# EAGLE board Warmie Helper Board V.9.5 (GND EN 3.3v) (EAGLE 6.4)
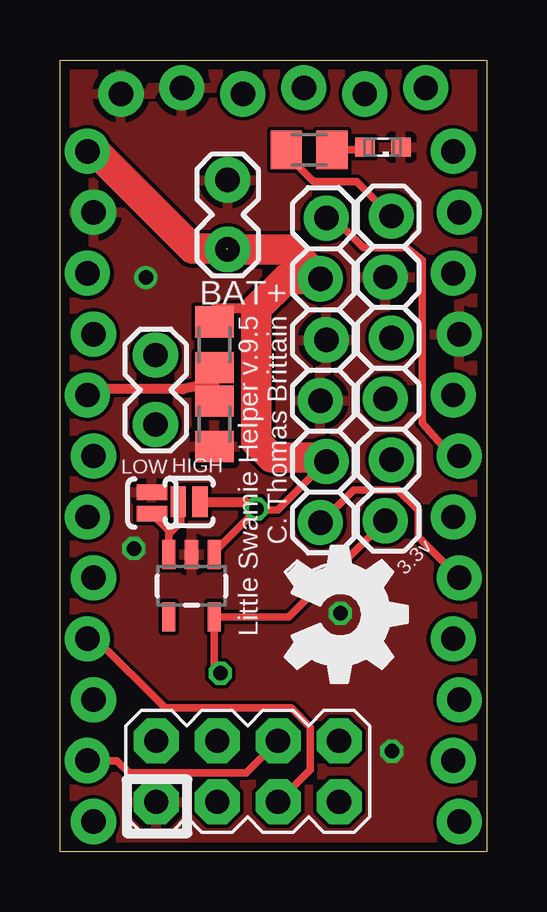
[diagram p0: board, top side]
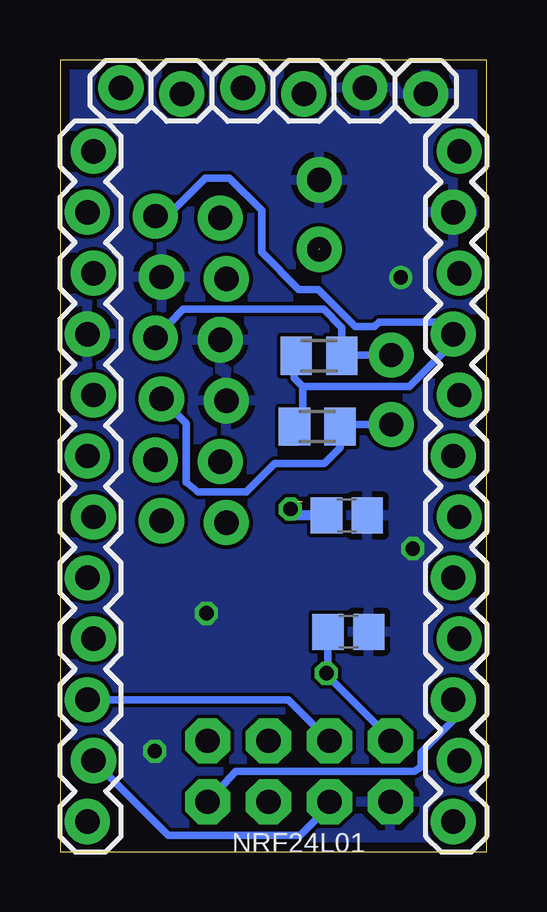
[diagram p1: board, bottom side, seen from below]

Size 17.78 x 33.02 mm. Coordinates in mm from the lower left corner, seen from the top.
Outline: 17.78,0 0,0 0,33.02 17.78,33.02 17.78,0
Copper layers (1*16): Top 0.0356mm / dielectric 1.25mm / Bottom 0.0356mm
Design rules "LaenPCBOrder *": minimum track width 6mil, minimum drill 13mil, track to track 6mil, track to pad 6mil, pad to pad 6mil, via to via 6mil, smd to smd 6mil, copper to edge 15mil, drill to drill 6mil, minimum pad ring 7mil, minimum via ring 7mil, stop-mask expansion 4mil, vias tented up to drill 6mm, thermal gap 10mil

## Footprints (pad centres in the part's own frame; a part is rotated, then mirrored left to right if it is on the bottom)
1X02_LOCK = drill 1.016 pad 1.88: 1 -0.178,0; 2 2.718,0
C0805 = smd 1.3 x 1.5: 1 -0.85,0; 2 0.85,0
1X12_LOCK = drill 1.016 pad 1.88: 1 0,0.127; 2 2.54,-0.127; 3 5.08,0.127; 4 7.62,-0.127; 5 10.16,0.127; 6 12.7,-0.127; 7 15.24,0.127; 8 17.78,-0.127; 9 20.32,0.127; 10 22.86,-0.127; 11 25.4,0.127; 12 27.94,-0.127
1X06_LOCK = drill 1.016 pad 1.88: 1 0,0; 2 2.54,-0.254; 3 5.08,0; 4 7.62,-0.254; 5 10.16,0; 6 12.7,-0.254
SML0603 = smd 0.8 x 0.8: A 0.75,0; C -0.75,0
2X4 = drill 1.016 pad 1.88 octagon: 1 -3.81,-1.27; 2 -3.81,1.27; 3 -1.27,-1.27; 4 -1.27,1.27; 5 1.27,-1.27; 6 1.27,1.27; 7 3.81,-1.27; 8 3.81,1.27
M0805 = smd 1.3 x 1.6: 1 -0.95,0; 2 0.95,0
SJ_2S-NO = smd 0.635 x 1.27: 1 -0.45,0; 2 0.45,0
SOT23-5 = smd 0.55 x 1.2: 1 -0.95,-1.3; 2 0,-1.3; 3 0.95,-1.3; 4 0.95,1.3; 5 -0.95,1.3

## Placement (x,y rotation side)
BATTERY  [1X02_LOCK]  6.98,25.3 90 top
C1  1uF  [C0805]  5.76,9.18 0 bottom
C2  1uF  [C0805]  5.83,14.03 0 bottom
JP1  M12LOCK  [1X12_LOCK]  1.27,1.27 90 bottom
JP2  M12LOCK  [1X12_LOCK]  16.51,1.27 90 bottom
JP5  [1X02_LOCK]  3.98,18 90 top
JP6  [1X06_LOCK]  2.54,31.6 180 bottom
JP8  [1X06_LOCK]  10.85,13.73 90 top
JP9  [1X06_LOCK]  13.8,26.51 270 top
LED1  [SML0603]  13.46,29.38 180 top
NRF24L01  M04X2  [2X4]  7.82,3.36 180 top
R1  4.7k  [M0805]  7.06,17.74 0 bottom
R2  4.7k  [M0805]  6.99,20.69 0 bottom
R3  330  [M0805]  10.38,29.27 180 top
R4  330  [M0805]  6.43,21.15 270 top
R5  330  [M0805]  6.43,17.85 270 top
SJ1  SOLDERJUMPERNO  [SJ_2S-NO]  5.38,14.6 0 top
SJ2  SOLDERJUMPERNO  [SJ_2S-NO]  3.83,14.55 270 top
U1  AAT3221/22  [SOT23-5]  5.48,11.1 180 top
U$2  [OSHW_FILLX200_NOTEXT]  9.39,12.74 270 top

## Library data of the parts
BATTERY JP1 JP2 JP5 JP6 JP8 JP9 NRF24L01 SJ1 SJ2 U1 = SparkFun
C1 C2 R1-R5 = resistor
LED1 = led
U$2 = ohw-logo

## Nets
5V: JP1.9 JP9.1 R1.1 R2.1 R3.2
A0: JP1.5
A1: JP1.6
A2: JP1.7
A3: JP1.8 R4.2 R5.1
A4: JP5.1 JP9.4 R1.2
A5: JP5.2 JP9.3 R2.2
CE: JP2.2 NRF24L01.6
CSN: JP2.3 NRF24L01.5
D2: JP2.8
D3: JP2.7 JP8.6
D4: JP2.6
D5: JP2.5 JP8.1
D6: JP2.4
D9: JP2.1
DTR: JP6.6
GND: BATTERY.2 C1.2 C2.2 JP1.11 JP2.9 JP6.1 JP6.2 JP8.3 JP8.4 JP9.2 LED1.C NRF24L01.8 R5.2 SJ2.1 U1.2
IRQ: NRF24L01.1
MISO: JP1.3 NRF24L01.2
MOSI: JP1.2 NRF24L01.3
N$1: SJ1.1 SJ2.2 U1.3
N$2: LED1.A R3.1
RST1: JP1.10
RST2: JP2.10
RX1: JP6.4
RX2: JP2.11
SCK: JP1.4 NRF24L01.4
TX1: JP6.5
TX2: JP2.12
V3.3: C1.1 JP9.6 NRF24L01.7 U1.5
VBUS: JP6.3
VIN: BATTERY.1 C2.1 JP1.12 JP8.2 JP8.5 R4.1 SJ1.2 U1.1

## Tracks (layer width: path | path; a pad name or v marks a point on that pad's centre or on a via)
5V
  Top 0.305: R3.2 9.43,29.1 10.58,27.95 12.36,27.95 JP9.1
  Bottom 0.305: R2.1 8.01,20.62 8.01,19.75 7.66,19.4 | 7.66,19.4 3.23,19.4 1.4,21.23 JP1.9 1.91,22.1 4.48,22.1 4.68,21.9 5.48,21.9 7.03,23.45 7.83,23.45 9.38,25 9.38,26.75 10.73,28.1 11.73,28.1 13.32,26.51 JP9.1 | 7.66,19.4 7.66,18.09 R1.1
A3
  Top 0.406: R4.2 R5.1 6.33,19.55 5.13,19.3 1.39,19.3 JP1.8
A4
  Bottom 0.305: JP5.1 6.03,17.82 R1.2 6.11,16.87 6.78,16.2 8.83,16.2 10.01,15.01 12.01,15.01 12.53,15.4 12.53,17.87 JP9.4
A5
  Bottom 0.305: JP5.2 6.01,20.72 R2.2 6.04,21.86 6.79,22.64 12.64,22.64 JP9.3
CE
  Bottom 0.305: NRF24L01.6 6.55,1.93 7.78,0.7 13.27,0.7 JP2.2
CSN
  Bottom 0.305: JP2.3 8.27,6.35 NRF24L01.5
D3
  Top 0.305: JP2.7 16.22,16.51 16.22,16.61 15.09,17.89 15.09,24.68 14.43,25.2 12.63,25.2 11.4,26.43 JP8.6
D5
  Top 0.305: JP8.1 10.86,13.73 12.23,15.1 14.08,15.1 14.93,14.25 14.93,13.14 JP2.5
GND  (via drill 0.6)
  other vias: 3.08,12.65 13.83,4.2 11.68,9.95 3.58,23.95
  pour Top: -0.22,0 -0.22,33 17.78,33 17.78,0
  pour Bottom: -0.22,0 -0.22,33 17.78,33 17.78,0
MISO
  Bottom 0.305: JP1.3 1.4,5.48 2.73,4.15 2.73,3.55 3.01,3.36 10.46,3.36 NRF24L01.2
MOSI
  Top 0.305: JP1.2 2.37,3.81 2.88,3.3 7.76,3.3 NRF24L01.3
N$1
  Top 0.305: U1.3 4.53,13.25 | 4.53,13.25 5.03,13.75 5.03,14.5 SJ1.1 | 4.53,13.25 4.53,13.4 SJ2.2
N$2
  Top 0.305: R3.1 12.6,29.27 LED1.A
SCK
  Top 0.305: JP1.4 1.49,8.89 4.38,6 9.63,6 10.43,5.2 10.43,3.43 NRF24L01.4
V3.3  (via drill 0.6)
  Top 0.305: JP9.6 9.54,9.8 U1.5 6.43,7.7 v6.68,7.45
  Bottom 0.305: NRF24L01.7 4.01,4.73 6.68,7.4 v6.68,7.45 6.61,7.52 C1.1 6.68,9.12
VIN  (via drill 0.6)  (2 unrouted)
  Top 0.305: 8.18,14.25 6.43,12.5 U1.1 | 8.18,14.25 9.08,14.25 JP8.2 10.92,16.45 | JP1.12 1.47,29.21 | 8.18,14.25 v8.18,14.3 7.88,14.6
  Top 0.406: SJ1.2 7.68,14.6 | 8.18,22.65 6.43,22.65 R4.1
  Top 1.27: 1.47,29.21 5.53,25.15 6.95,25.15 | 10.92,16.45 8.83,16.45 8.18,17.1 8.18,22.65 9.42,23.89 JP8.5 9.62,25.12 BATTERY.1
  Bottom 0.305: 7.91,14.03 v8.18,14.3 8.23,14.25 8.28,14.25
  Bottom 0.406: C2.1 8.18,14.03 v8.18,14.3

## Text on the board
_tsilk: BAT+ | Little Swamie Helper v.9.5 / C. Thomas Brittain | LOW | HIGH | 3.3v
_bsilk: NRF24L01